# Altium PCB 7797-20-0224.PcbDoc (part 1 of 2)
Units mil, origin at the board's own origin, x right, y up, seen from the top; angles counter-clockwise.
Board outline 1500 x 3000 mil, 6 copper layers (Top Layer, GND, NS, EW, PWR, Bottom Layer), stack 48.468 mil thick; 119 components, 95 nets, 430 pads, 191 vias.
Unrouted connection lines stored in the file: 5.
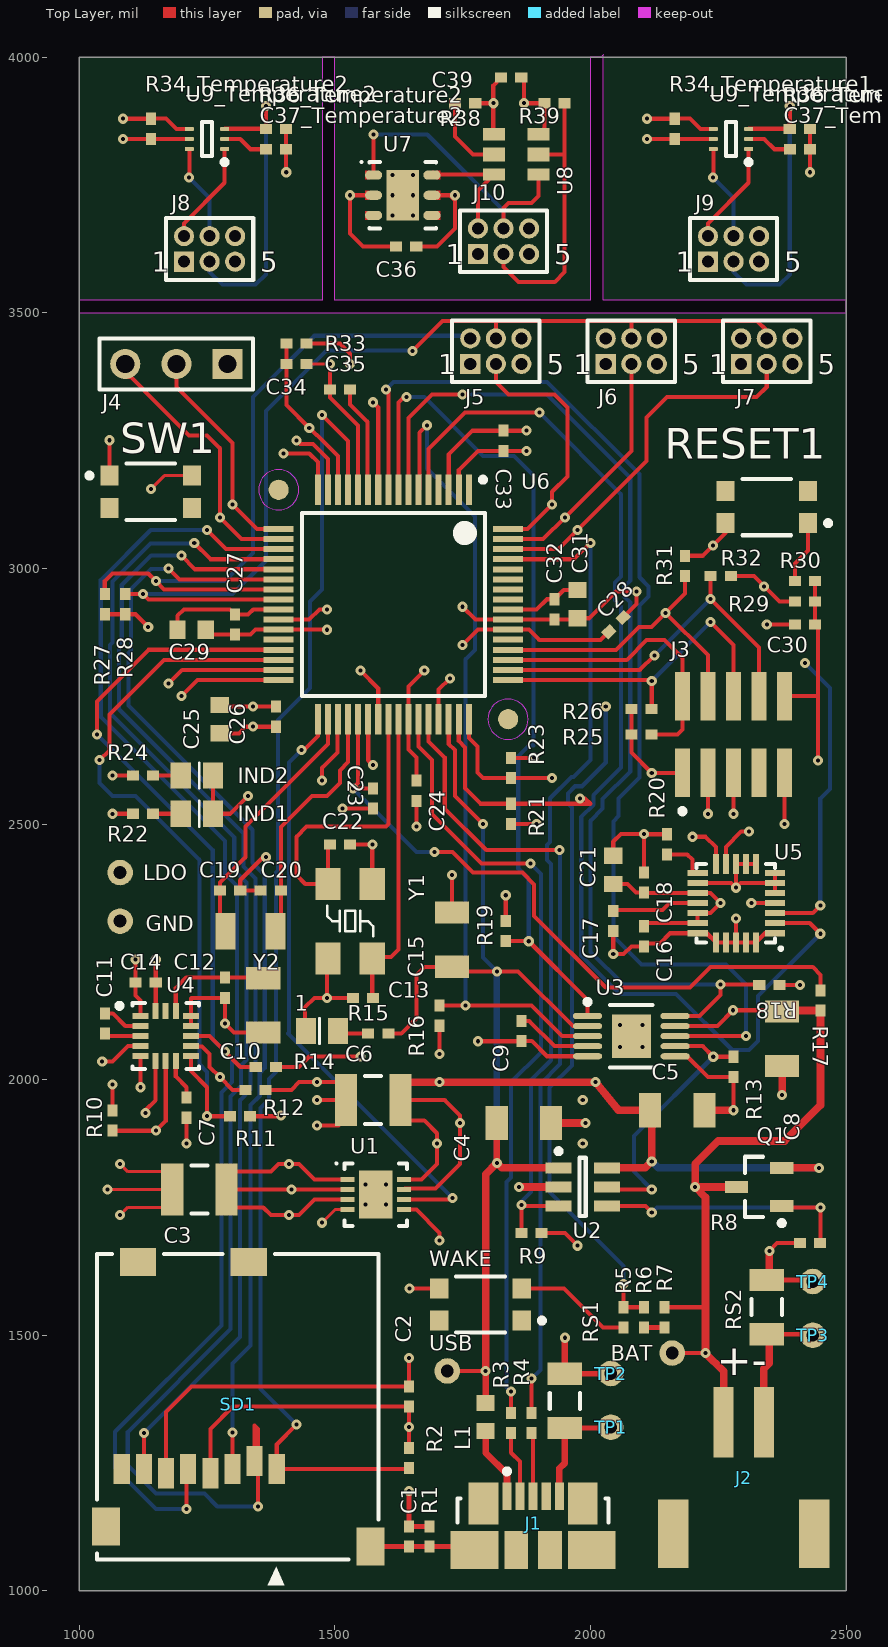
[diagram p0: Top Layer view]
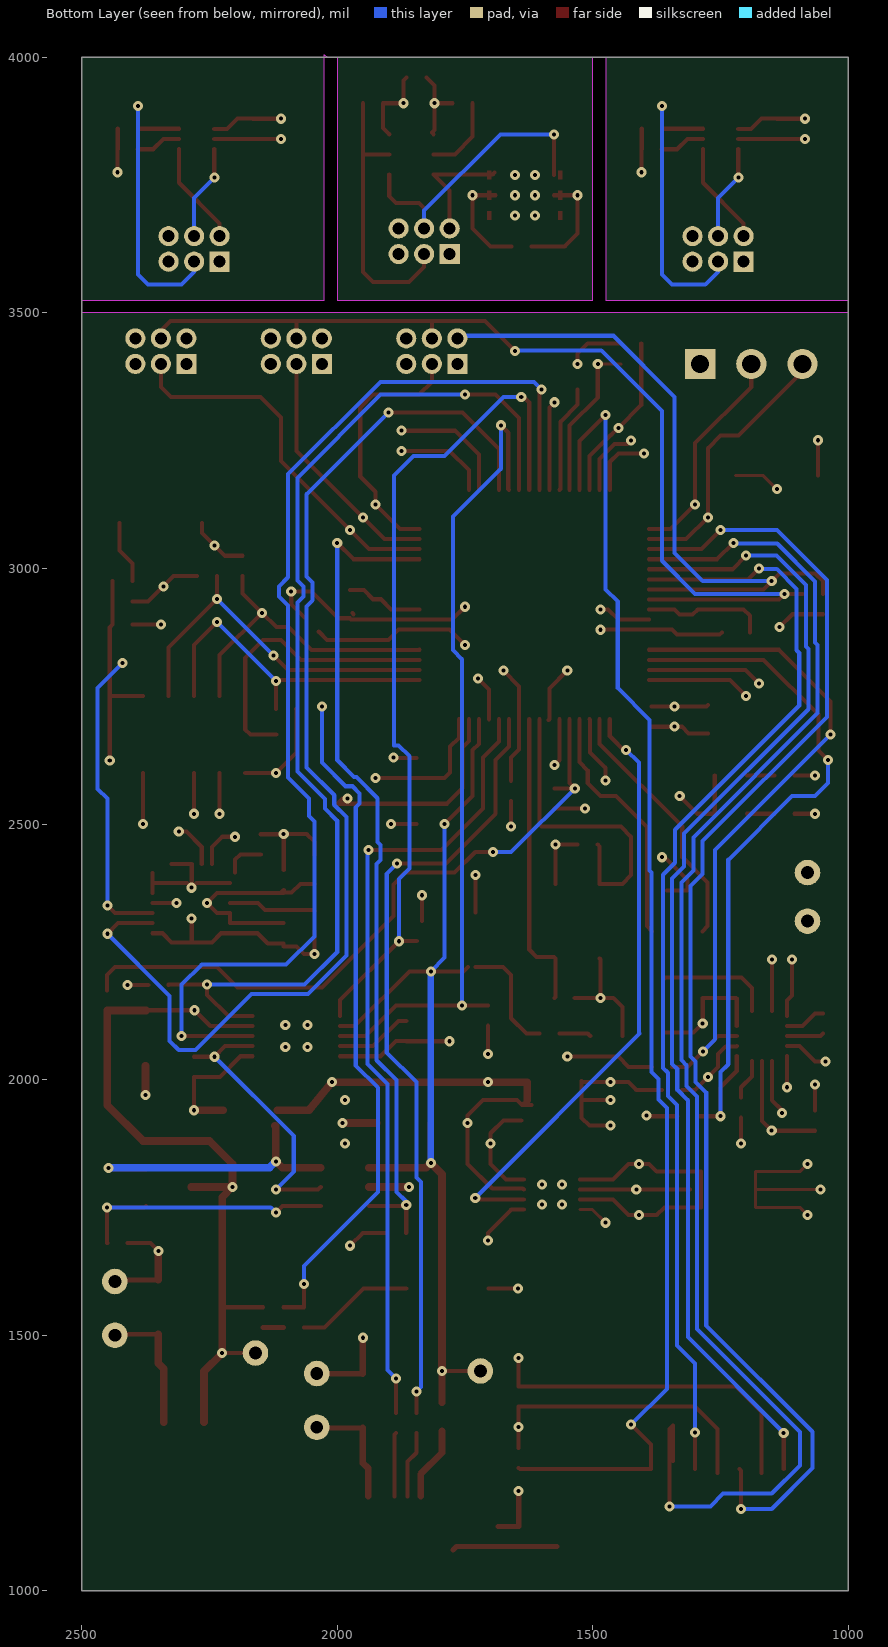
[diagram p1: Bottom Layer view, seen from below]
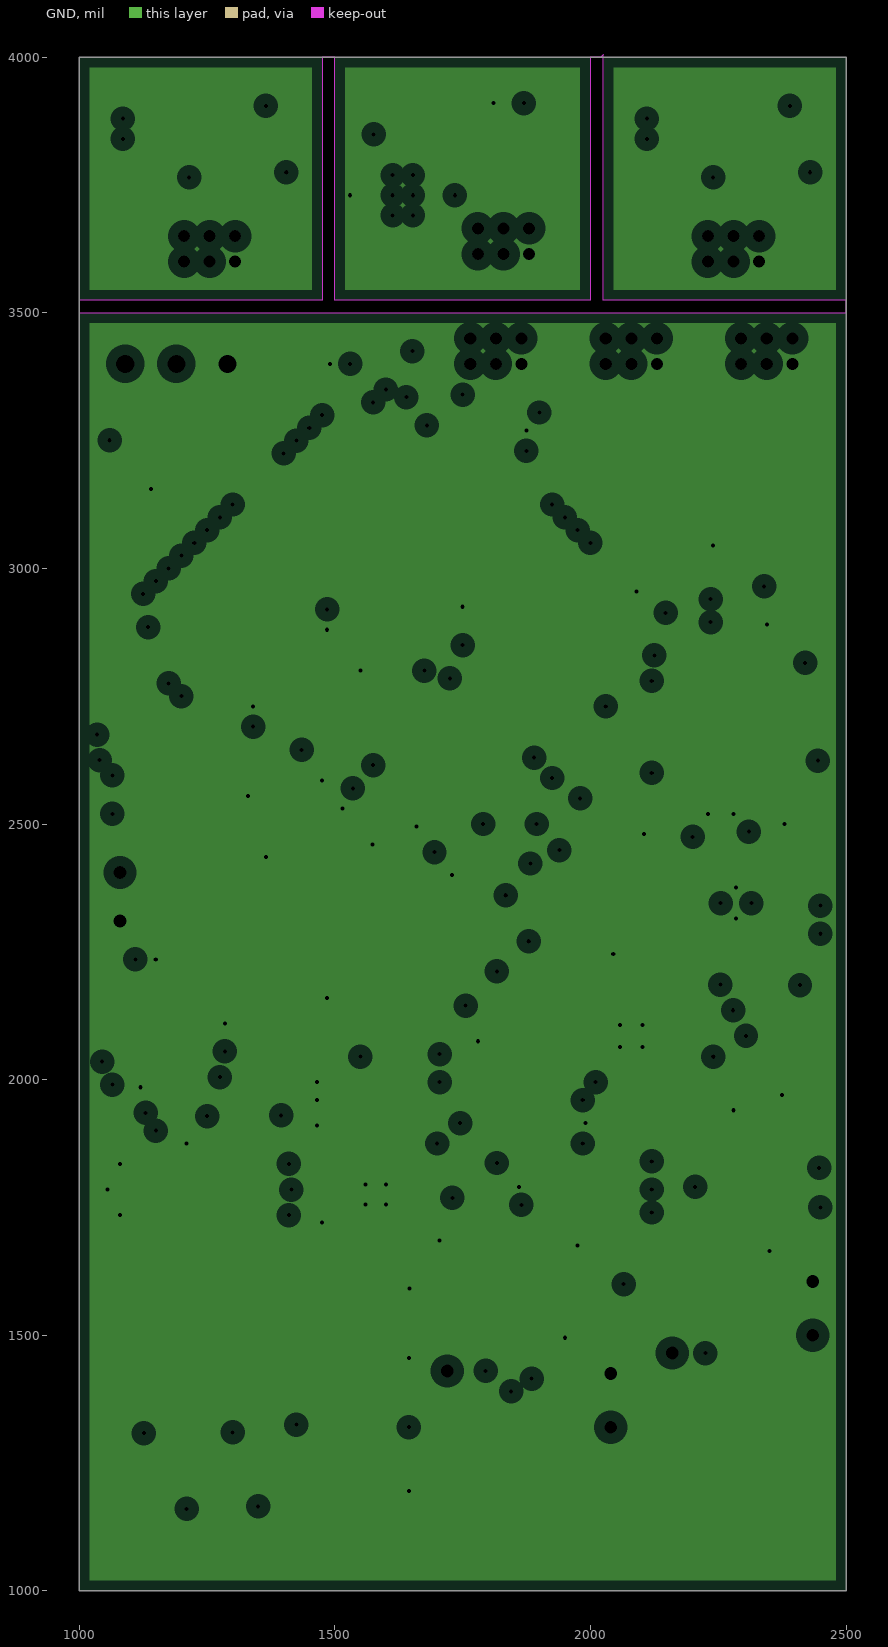
[diagram p2: GND, clearances drawn from the general rule]
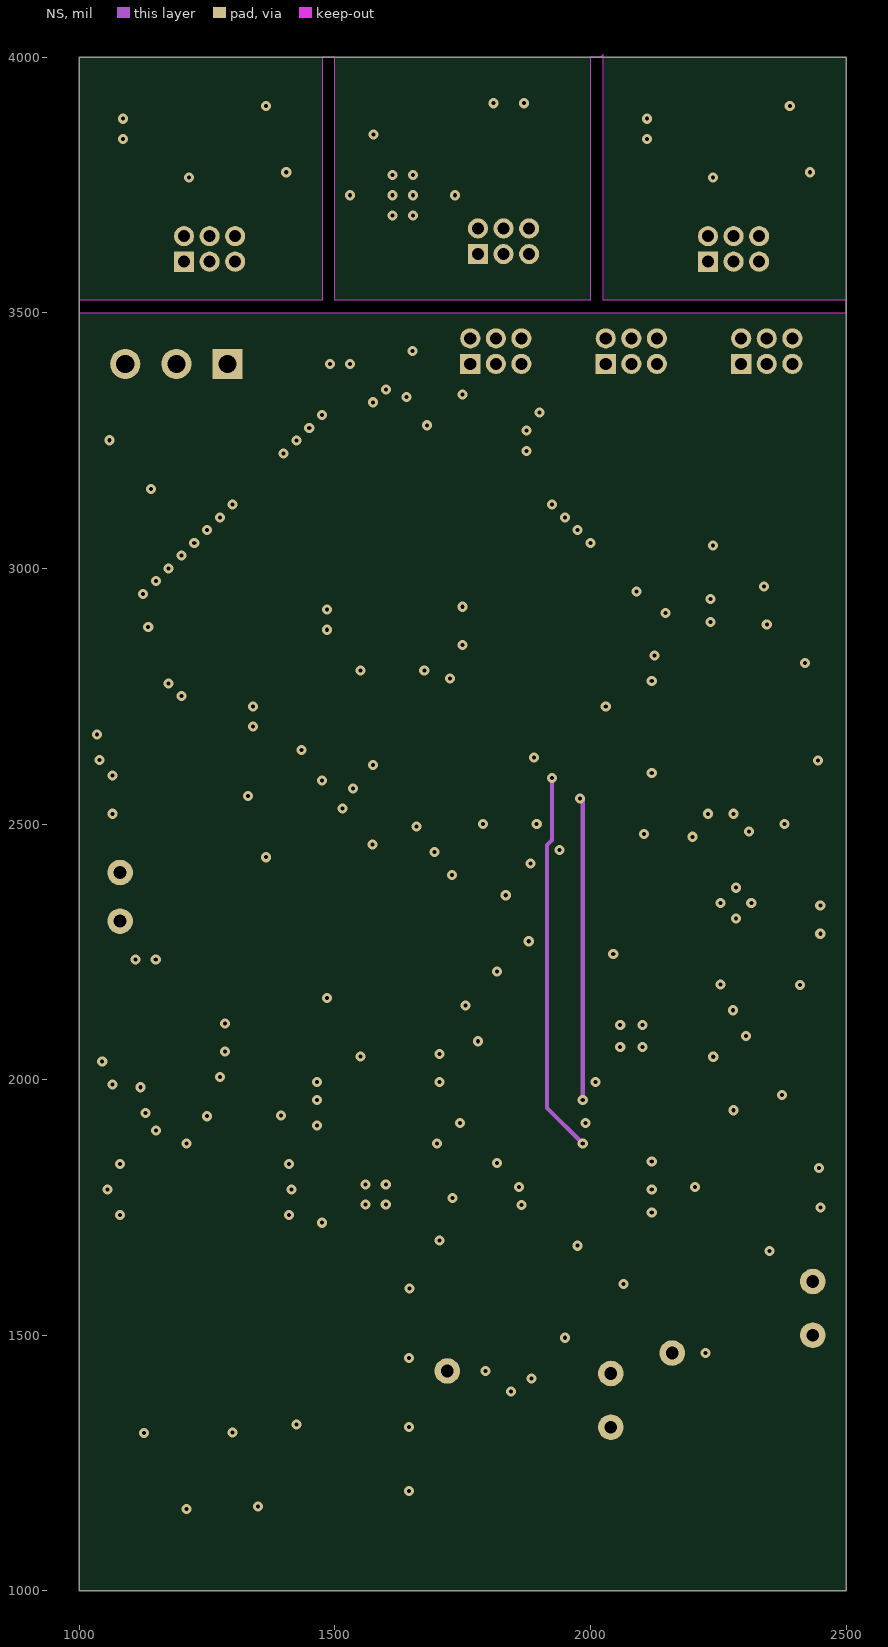
[diagram p3: NS]
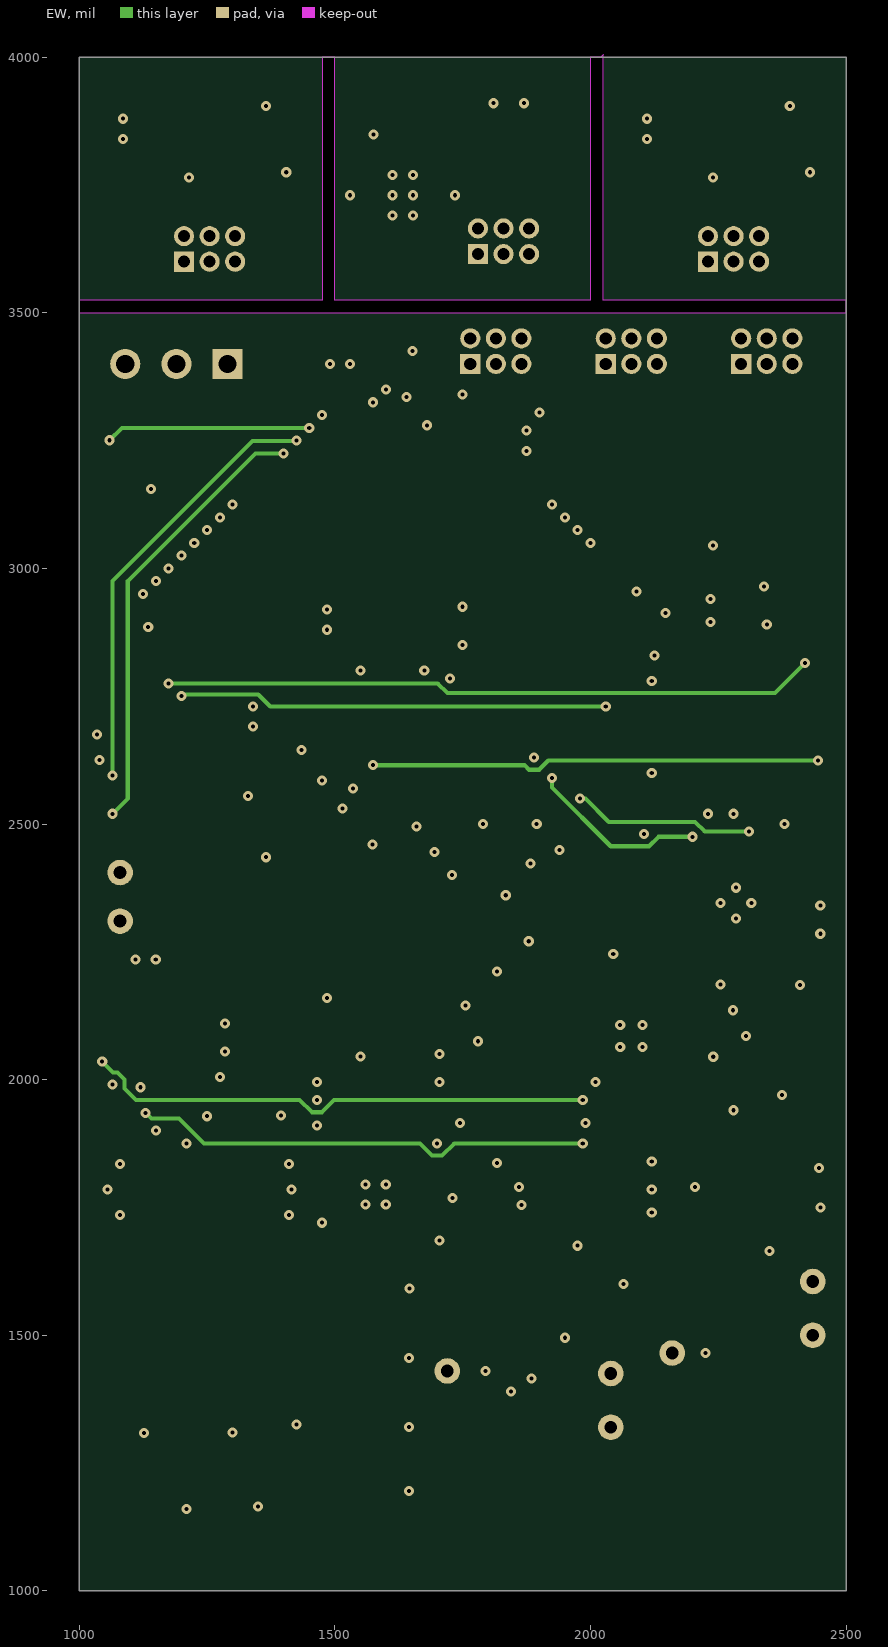
[diagram p4: EW]
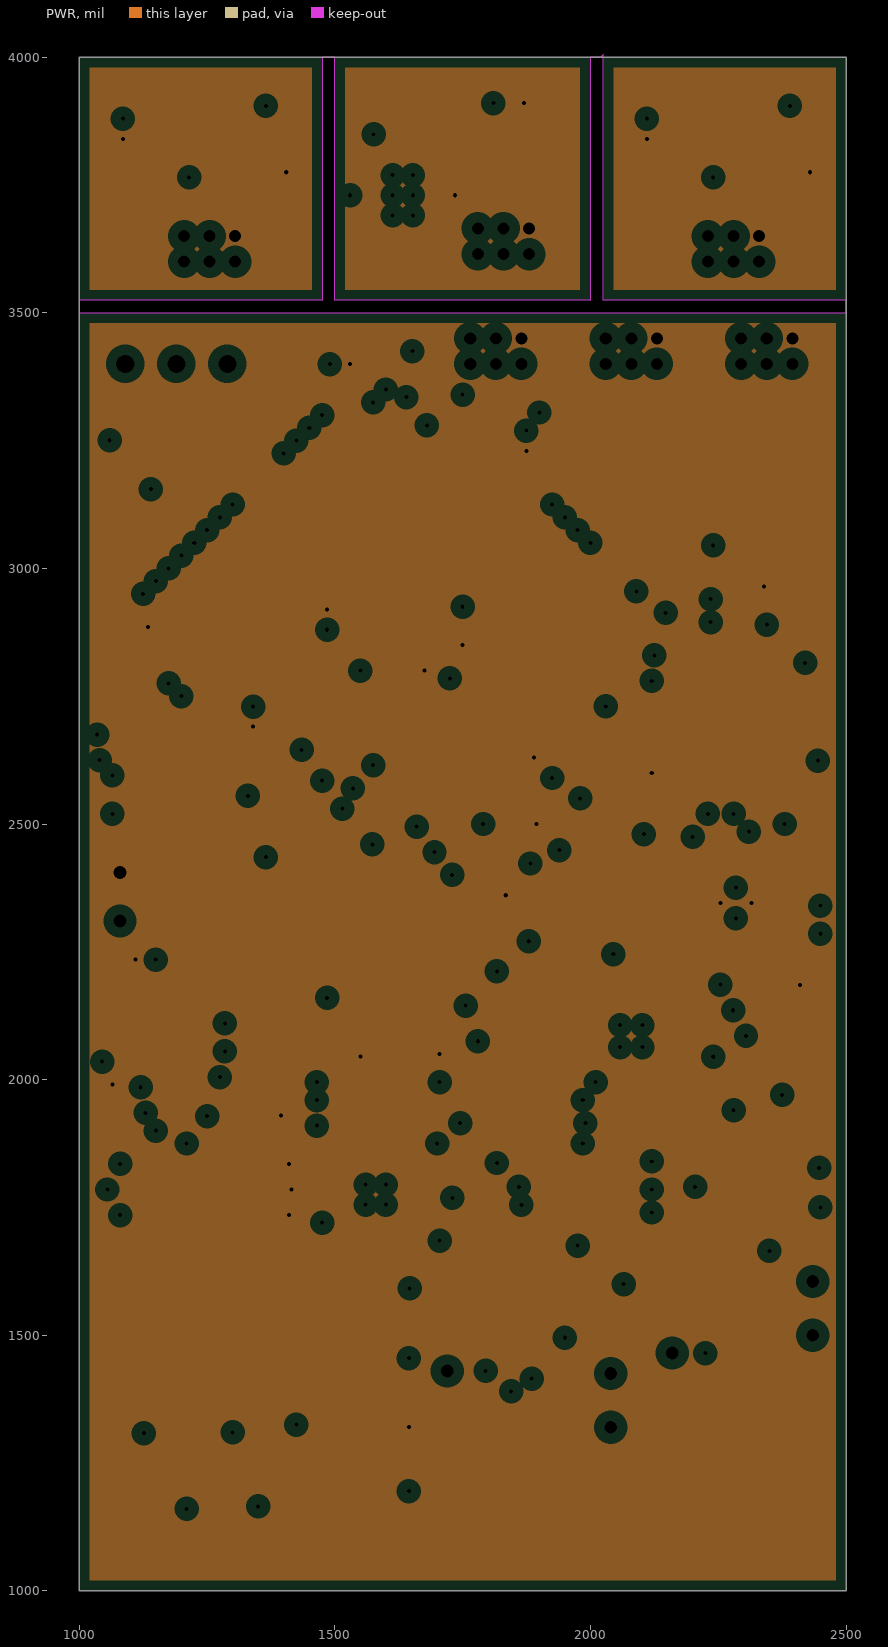
[diagram p5: PWR, clearances drawn from the general rule]

## Layer stack, top to bottom
Top Solder: solder mask 0.4, Solder Resist, Dk 3.5
Top Layer: signal copper 1.4
Dielectric 2: core 10, Dk 4.2
GND: plane copper 1.417, net (Multiple Nets)
Dielectric 1: prepreg 5, FR-4, Dk 4.2
NS: signal copper 1.417
Dielectric 4: core 10, Dk 4.2
EW: signal copper 1.417
Dielectric 5: prepreg 5, Dk 4.2
PWR: plane copper 1.417, net (Multiple Nets)
Dielectric 3: core 10, Dk 4.2
Bottom Layer: signal copper 1.4
Bottom Solder: solder mask 0.4, Solder Resist, Dk 3.5

## Board outline
1000,1000 1000,4000 2500,4000 2500,1000
cut-out: 1000,3500 2500,3500 2500,3525 2025,3525 2025,4005 2020,4000 2000,4000 2000,3525 1500,3525 1500,4000 1475,4000 1475,3525 1000,3525

## Design rules (kind name [scope] priority, off if disabled: settings)
Clearance Clearance-uC [HasFootprint('QFP50P1200X1200X160-64N') OR HasFootprint('LT-MSE-10-EDP-2060x1830TP_N') OR HasFootprint('SMD QFN 24_4X4MM 7/5') OR HasFootprint('FREE-QFN-16-3000X3000DE_V')] p1: gap=0 ignorepadtopadclearanceinfootprint=TRUE
Clearance [All] p2: gap=10 ignorepadtopadclearanceinfootprint=TRUE
PlaneClearance [All] p1: clearance=20
PlaneConnect [All] p1: planeconnectstyle=Relief reliefexpansion=20 reliefentries=4 reliefconductorwidth=10 reliefairgap=10
PolygonConnect [All] p1: connectstyle=Relief reliefconductorwidth=10 reliefentries=4 polygonreliefangle="90 Angle" airgapwidth=10
RoutingVias [All] p1: holewidth=28 width=50 viastyle="Through Hole" minholewidth=28 minwidth=50 maxholewidth=28 maxwidth=50 useviatemplates=TRUE viatemplateguid#1={3E3A0D4B-A0A5-4DA1-8870-E81B4EFEB651} viatemplatename#1=v50h20
SolderMaskExpansion [All] p1: expansion=4
Width "Width Power" [(InNet('sGND') OR InNet('sPWR_3V7') OR InNet('sPWR_5V0') OR InNet('sUNREG') OR InNet('NetJ203_1') OR InNet('NetJ200_1') OR InNet('NetJ200_5'))] p1: maxlimit=15 minlimit=6 preferedwidth=15
Width [All] p2: maxlimit=10 minlimit=8 preferedwidth=8
28 further rules are at their usual default settings.

## Classes and differential pairs
component class "Micro SD": C2 R2 SD1
component class "I2C 1": J5 J6 J7 J8 J9 J10 R27 R28
component class Gyroscope: C16 C17 C18 C21 R20 U5
component class Power: BAT C1 C3 C4 C5 C6 C8 C9 C15 GND J1 J2 L1 LDO Q1 R1 R3 R4 R8 R9 R13 R16 R18 R19 RS1 RS2 TP1 TP2 TP3 TP4 U1 U2 U3 USB
component class Microcontroller: 90 C13 C19 C20 C22 C23 C24 C25 C26 C27 C28 C29 C30 C31 C32 C33 C34 J3 R5 R6 R7 R17 R25 R26 R29 R30 R31 R32 RESET1 U6 WAKE Y1 Y2
component class "Accelerometer and Mangnetometer": C7 C10 C11 C12 C14 R10 R11 R12 R14 U4
component class "I2C 0": R21 R23
component class Light: C39 R38 R39 U8
component class Temperature2: C37_Temperature2 R34_Temperature2 R36_Temperature2 U9_Temperature2
component class Humidity: C36 U7
component class Temperature1: C37_Temperature1 R34_Temperature1 R36_Temperature1 U9_Temperature1
channel class _temperature: Temperature1 Temperature2
component class I/O: 1 C35 IND1 IND2 J4 R15 R22 R24 R33 SW1

## Components (designator, comment, footprint, x,y, rotation, side; value= is the part's Value field where it differs from the comment)
1 "LTST-C171TBKT" 0805 1475,2095 r180 top (schematic designator 5V0)
BAT "TP" TP_TH 2160,1465 r90 top
C1 "GRM155R71A104KA01D" 0402 1645,1106.38 r270 top value=0.1u (schematic designator C207)
C2 "GRM155R71C103KA01D" 0402 1645,1380 r270 top value="0.01 µF" (schematic designator C600)
C3 "GRM32ER71H106KA12L" 1210 1235,1785 r0 top value=10u (schematic designator C201)
C4 "GRM31CR71H475KA12L" 1206 1870,1915 r180 top value=4.7u (schematic designator C205)
C5 "GRM31CR71H475KA12L" 1206 2170,1940 r180 top value=4.7u (schematic designator C203)
C6 "GRM32ER71H106KA12L" 1210 1575,1960 r0 top value=10u (schematic designator C200)
C7 "GRM155R71A104KA01D" 0402 1210,1945 r270 top value=0.1u (schematic designator C310)
C8 "GRM31CR71H475KA12L" 1206 2375,2080 r90 top value=4.7u (schematic designator C204)
C9 "GRM155R71A104KA01D" 0402 1865,2095 r90 top value=0.1u (schematic designator C206)
C10 "GRM31CR71H475KA12L" 1206 1360,2145 r90 top value=4.7u (schematic designator C314)
C11 "GRM155R71A104KA01D" 0402 1050,2109.69 r270 top value=0.1u (schematic designator C311)
C12 "GRM155R71A104KA01D" 0402 1285,2179.68 r90 top value=0.1u (schematic designator C313)
C13 "GRM1555C1H330FA01D" 0402 1555,2160 r0 top value=33p (schematic designator C101)
C14 "GRM155R71A104KA01D" 0402 1130,2190 r180 top value=0.1u (schematic designator C312)
C15 "GRM31CR71H475KA12L" 1206 1729.37,2273.78 r270 top value=4.7u (schematic designator C202)
C16 "GRM155R71A104KA01D" 0402 2104.68,2280.32 r90 top value=0.1u (schematic designator C321)
C17 "GRM155R71A104KA01D" 0402 2044.68,2310.32 r270 top value=0.1u (schematic designator C320)
C18 "GRM155R71A104KA01D" 0402 2104.68,2385.32 r270 top value=0.1u (schematic designator C322)
C19 "GRM1555C1H240GA01D" 0402 1295.32,2370 r180 top value=24p (schematic designator C103)
C20 "GRM1555C1H240GA01D" 0402 1374.68,2370 r0 top value=24p (schematic designator C104)
C21 "GRM188R71A105KA61J" 0603 2044.68,2410.32 r90 top value=1u (schematic designator C323)
C22 "GRM1555C1H330FA01D" 0402 1510,2460 r180 top value=33p (schematic designator C102)
C23 "GRM155R71A104KA01D" 0402 1575,2550 r270 top value=0.1u (schematic designator C107)
C24 "GRM155R71A104KA01D" 0402 1660,2565 r270 top value=0.1u (schematic designator C114)
C25 "GRM188R71A105KA61J" 0603 1275,2705 r90 top value=1u (schematic designator C115)
C26 "GRM155R71C103KA01D" 0402 1385,2710 r90 top value="0.01 µF" (schematic designator C108)
C27 "GRM155R71A104KA01D" 0402 1305,2890 r270 top value=0.1u (schematic designator C106)
C28 "GRM155R71C103KA01D" 0402 2050,2890 r45 top value="0.01 µF" (schematic designator C105)
C29 "GRM188R71A225KE15D" 0603 1220,2880 r0 top value=2.2u (schematic designator C113)
C30 "GRM155R71A104KA01D" 0402 2420,2890 r180 top value=0.1u (schematic designator C100)
C31 "GRM188R71A105KA61J" 0603 1975,2930 r270 top value=1u (schematic designator C111)
C32 "GRM155R71A104KA01D" 0402 1930,2920 r270 top value=0.1u (schematic designator C109)
C33 "GRM155R71C103KA01D" 0402 1830,3249.69 r90 top value="0.01 µF" (schematic designator C110)
C34 "GRM155R71A104KA01D" 0402 1510,3350 r180 top value=0.1u (schematic designator C112)
C35 "GRM022R71A102KA12L" 0402 1425,3400 r180 top value=1000p (schematic designator C500)
C36 "GRM155R71A104KA01D" 0402 1639.69,3630 r0 top value=0.1u (schematic designator C430)
C37_Temperature1 "GRM155R71C103KA01D" 0402 2410,3820 r0 top value="0.01 µF" (schematic designator C37)
C37_Temperature2 "GRM155R71C103KA01D" 0402 1385,3820 r0 top value="0.01 µF" (schematic designator C37)
C39 "GRM155R71A104KA01D" 0402 1845,3960 r0 top value=0.1u (schematic designator C420)
GND "TP" TP_TH 1080,2310 r90 top
IND1 "LTST-C171GKT" 0805 1230,2520 r0 top
IND2 "LTST-C171KSKT" 0805 1230,2595 r0 top
J1 "47346-0001" MOLX-47346-0001-5_V 1887.97,1087.87 r0 top locked (schematic designator J200)
J2 "S2B-PH-SM4-TB" S2B-PH-SM4-TB 2300,1330 r0 top locked (schematic designator J203)
J3 "M50-3600542" M50-3600542 2280,2675 r0 top (schematic designator J100)
J4 "Header 3" HDR1X3 1290,3400 r180 top (schematic designator J500)
J5 "MHDR2X3" MHDR2X3 1765,3400 r0 top (schematic designator J400)
J6 "MHDR2X3" MHDR2X3 2030,3400 r0 top (schematic designator J402)
J7 "MHDR2X3" MHDR2X3 2295,3400 r0 top (schematic designator J404)
J8 "MHDR2X3" MHDR2X3 1205,3600 r0 top (schematic designator J401)
J9 "MHDR2X3" MHDR2X3 2230,3600 r0 top (schematic designator J405)
J10 "MHDR2X3" MHDR2X3 1780,3615 r0 top (schematic designator J403)
L1 "MPZ1608S331A" 1608[0603] 1795,1340 r90 top value="330 ohms" (schematic designator L200)
LDO "TP" TP_TH 1080,2405 r90 top
Q1 "IRLML6401" Micro3_N 2330,1790 r180 top (schematic designator Q200)
R1 "CRCW04021M00FKEDHP" 0402 1685,1106.38 r270 top value=1M (schematic designator R207)
R2 "CRCW040210K0FKEDHP" 0402 1645,1260 r90 top value=10k (schematic designator R600)
R3 "CRCW040233R0FKED" 0402 1845,1328.19 r90 top value=33 (schematic designator R200)
R4 "CRCW040233R0FKED" 0402 1885,1328.19 r90 top value=33 (schematic designator R201)
R5 "CRCW0402100KFKED" 0402 2065,1535 r90 top value=100k (schematic designator R104)
R6 "CRCW0402100KFKED" 0402 2105,1535 r90 top value=100k (schematic designator R103)
R7 "CRCW0402100KFKED" 0402 2145,1535 r270 top value=100k (schematic designator R102)
R8 "CRCW04021M00FKEDHP" 0402 2429.68,1680 r0 top value=1M (schematic designator R202)
R9 "CRCW040210K0FKED" 0402 1885,1700 r180 top value=10k (schematic designator R208)
R10 "CRCW040210K0FKED" 0402 1065,1919.68 r90 top value=10k (schematic designator R312)
R11 "CRCW040210K0FKED" 0402 1314.69,1928.33 r180 top value=10k (schematic designator R310)
R12 "CRCW040210K0FKED" 0402 1345,1980 r0 top value=10k (schematic designator R313)
R13 "CRCW04023K40FKED" 0402 2280,2025 r90 top value=3.4k (schematic designator R204)
R14 "CRCW040210K0FKED" 0402 1365,2025 r180 top value=10k (schematic designator R311)
R15 "CRCW0402560RFKEDHP" 0402 1585,2090 r0 top value=560 (schematic designator R503)
R16 "CRCW040210K0FKED" 0402 1705,2125 r90 top value=10k (schematic designator R206)
R17 "CRCW040256R0FKED" 0402 2450,2155 r270 top value=56 (schematic designator R106)
R18 "CRCW040210K0FKED" 0402 2350,2185 r180 top value=10k (schematic designator R205)
R19 "CRCW040210K0FKED" 0402 1834.37,2290.63 r270 top value=10k (schematic designator R203)
R20 "CRCW040210K0FKED" 0402 2149.68,2460.32 r90 top value=10k (schematic designator R320)
R21 "CRCW04025K60FKEDHP" 0402 1845,2520 r270 top value=5.6k (schematic designator R300)
R22 "CRCW0402560RFKEDHP" 0402 1125,2520 r180 top value=560 (schematic designator R500)
R23 "CRCW04025K60FKEDHP" 0402 1845,2609.68 r90 top value=5.6k (schematic designator R301)
R24 "CRCW0402560RFKEDHP" 0402 1125,2595 r180 top value=560 (schematic designator R501)
R25 "CRCW040210K0FKED" 0402 2099.68,2675 r0 top value=10k (schematic designator R108)
R26 "CRCW040210K0FKED" 0402 2100,2725 r0 top value=10k (schematic designator R107)
R27 "CRCW04025K60FKEDHP" 0402 1050,2930 r270 top value=5.6k (schematic designator R400)
R28 "CRCW04025K60FKEDHP" 0402 1090,2930 r270 top value=5.6k (schematic designator R401)
R29 "CRCW040210K0FKED" 0402 2420,2935 r180 top value=10k (schematic designator R100)
R30 "CRCW0402560RFKEDHP" 0402 2420,2975 r0 top value=560 (schematic designator R101)
R31 "CRCW040210K0FKED" 0402 2185,3005 r270 top value=10k (schematic designator R109)
R32 "CRCW040210K0FKED" 0402 2255,2985 r180 top value=10k (schematic designator R105)
R33 "CRCW040210K0FKEDHP" 0402 1425,3440 r0 top value=10k (schematic designator R502)
R34_Temperature1 "CRCW040210K0FKED" 0402 2165,3860 r270 top value=10k (schematic designator R34)
R34_Temperature2 "CRCW040210K0FKED" 0402 1140,3860 r270 top value=10k (schematic designator R34)
R36_Temperature1 "CRCW040210K0FKED" 0402 2409.68,3860 r180 top value=10k (schematic designator R36)
R36_Temperature2 "CRCW040210K0FKED" 0402 1384.68,3860 r180 top value=10k (schematic designator R36)
R38 "CRCW040210K0FKED" 0402 1755,3910 r0 top value=10k (schematic designator R421)
R39 "CRCW040210K0FKED" 0402 1930,3910 r0 top value=10k (schematic designator R420)
RESET1 "KMR231GLFS" CKCP-KMR231GLFS 2345,3120 r180 top (schematic designator RESET)
RS1 "WSL1206R1000FEA" C1206 1950,1371.5 r270 top value=0.1 (schematic designator RS200)
RS2 "WSL1206R1000FEA" C1206 2345,1555 r270 top value=0.1 (schematic designator RS201)
SD1 "2908-05WB-MG" 3M-2908-05WB-MG_V 1310,1360 r180 top locked (schematic designator SD600)
SW1 "KMR231GLFS" CKCP-KMR231GLFS 1140,3150 r0 top
TP1 "TP" TP_TH 2040,1320 r90 top (schematic designator TP200)
TP2 "TP" TP_TH 2040,1425 r90 top (schematic designator TP201)
TP3 "TP" TP_TH 2435,1500 r90 top (schematic designator TP202)
TP4 "TP" TP_TH 2435,1605 r90 top (schematic designator TP203)
U1 "LT1965EDD-3.3#TRPBF" LT-DD-8_V 1580,1775 r0 top (schematic designator U200)
U2 "LTC4410ES6#PBF" LT-S6-6-TSOT-23_N 1985,1790 r0 top (schematic designator U202)
U3 "LTC4053EMSE-4.2#PBF" LT-MSE-10-EDP-2060x1830TP_N 2080,2085 r0 top (schematic designator U201)
U4 "FXOS8700CQR1" FREE-QFN-16-3000X3000DE_V 1169.21,2085.32 r0 top (schematic designator U310)
U5 "FXAS21002C" "SMD QFN 24_4X4MM 7/5" 2284.68,2345.32 r180 top (schematic designator U320)
U6 "TM4C123GH6PM" QFP50P1200X1200X160-64N 1614.53,2929.41 r270 top (schematic designator U100)
U7 "SI7006-A20-IM1" SLAB-DFN-6-1500X2400TP_V 1632.91,3730 r0 top (schematic designator U430)
U8 "APDS-9303" APDS-9303 1855,3810 r180 top (schematic designator U420)
U9_Temperature1 "TMP102AIDRLT" DRL0006A_L 2275,3840 r180 top (schematic designator U9)
U9_Temperature2 "TMP102AIDRLT" DRL0006A_L 1250,3840 r180 top (schematic designator U9)
USB "TP" TP_TH 1720,1430 r90 top
WAKE "KMR231GLFS" CKCP-KMR231GLFS 1785,1560 r180 top
Y1 "ECS-160-20-30B-DU" ECX-53B 1530,2310 r90 top (schematic designator Y100)
Y2 "CC7V-T1A-32.768kHz-12.5pF-20PPM-TC-QC" CC7V-T1A 1335,2290 r0 top (schematic designator Y101)

## Footprints (in the part's own frame and the unit in brackets; to place one, negate y for a bottom-side part, rotate by r counter-clockwise, add the part's x,y. Pads: shape width x height; smd on the part's side, far side on the other; paste and mask are expansions set on the pad)
3M-2908-05WB-MG_V [mm] "Connector, MicroSD, 8 Position, Body 15.2x14mm, Pitch 1.1mm"
  rect 0.8x1.5 smd: 1(-1.94,3.1) 2(-0.84,2.7) 3(0.26,3.1) 4(1.36,3.3) 5(2.46,3.1) 6(3.56,3.3) 7(4.66,3.1) 8(5.76,3.1)
  rect 1.4x1.9 smd: 9(6.55,5.95) 12(-6.6,6.95)
  rect 1.8x1.4 smd: 10(4.95,-7.2) 11(-0.55,-7.2)
  silkscreen extent -7,-7.6 7,8.87, body extent -7,-7.6 7,7.6, height 1.85
0402 [mm] "Chip Capacitor, Body 1.0x0.5mm, IPC High Density"
  rect 0.6x0.5 smd: 1(-0.5,0) 2(0.5,0)
  body extent -0.55,-0.3 0.55,0.3, height 1.3
0603 [mm] "Chip Capacitor, Body 1.6x0.8mm, IPC High Density"
  rect 0.8x0.9 smd: 1(-0.7,0) 2(0.7,0)
  body extent -0.87,-0.48 0.87,0.48, height 1.3
0805 [mm]
  rect 1x1.3 smd: 1(-0.8,0) 2(0.8,0)
  silkscreen extent 0.13,-0.64 0.13,0.63, body extent -1.07,-0.64 1.07,0.76, height 0.7
1206 [mm] "Chip Capacitor, Body 3.2x1.6mm, IPC High Density"
  rect 1.1x1.7 smd: 1(-1.35,0) 2(1.35,0)
  body extent -1.7,-0.9 1.7,0.9, height 1.3
1210 [mm] "Chip Capacitor, Body 3.2x2.5mm, IPC High Density"
  rect 1.1x2.6 smd: 1(-1.35,0) 2(1.35,0)
  silkscreen extent -0.4,-1.2 0.4,1.2, body extent -1.7,-1.35 1.7,1.35, height 1.3
1608[0603] [mm] "Chip Capacitor, Body 1.6x0.8mm, IPC High Density"
  rect 0.8x0.9 smd: 1(-0.7,0) 2(0.7,0)
  body extent -0.87,-0.48 0.87,0.48, height 1.3
APDS-9303 [mm]
  rect 1.1x0.6 smd: 1(-1.1,-1) 2(1.1,-1) 4(1.1,1) 5(-1.1,1)
  rect 1.1x0.7 smd: 3(1.1,0) 6(-1.1,0)
  body extent -1.3,-1.1 1.3,1.1, height 0.55
C1206 [mm] "Chip Capacitor, Body 3.2x1.6mm, IPC High Density"
  rect 1.1x1.7 smd: 1(-1.35,0) 2(1.35,0)
  silkscreen extent -0.4,-0.75 0.4,0.75, body extent -1.7,-0.9 1.7,0.9, height 1.3
CC7V-T1A [mm]
  rect 1x1.8 smd: 1(-1.25,0) 2(1.25,0)
  body extent -1.65,-0.76 1.65,0.76, height 0.9
CKCP-KMR231GLFS [mm] "SMD, 4-Leads, Body 4.6x2.8mm"
  rect 0.9x1 smd: 1(-2.05,0.8) 2(-2.05,-0.8) 3(2.05,0.8) 4(2.05,-0.8)
  silkscreen extent -3.17,-1.4 1.21,1.4, body extent -2.3,-1.4 2.3,1.4, height 1.92
DRL0006A_L [mm] "SOT23, 6-Leads, Body 1.7x1.3mm, Pitch 0.5mm, IPC High Density"
  rrect50% 0.45x0.2 smd: 1(-0.875,0.5) 2(-0.875,0) 3(-0.875,-0.5) 4(0.875,-0.5) 5(0.875,0) 6(0.875,0.5)
  silkscreen extent -1,-0.85 0.25,1.27, body extent -0.65,-0.85 0.65,0.85, height 0.6
ECX-53B [mm]
  rect 1.6x1.25 smd: 1(-1.85,-1.1) 2(1.85,-1.1) 3(1.85,1.1) 4(-1.85,1.1)
  silkscreen extent -0.76,-1.14 0.76,1.14, body extent -2.54,-1.65 2.54,1.65, height 0.85
FREE-QFN-16-3000X3000DE_V [mm] "QFN, 16-Leads, Body 3.00x3.00mm, Pitch 0.50mm"
  rect 0.8x0.3 smd: 1(-1.25,1) 2(-1.25,0.5) 3(-1.25,0) 4(-1.25,-0.5) 5(-1.25,-1) 9(1.25,-1) 10(1.25,-0.5) 11(1.25,0) 12(1.25,0.5) 13(1.25,1)
  rect 0.3x0.8 smd: 6(-0.5,-1.25) 7(0,-1.25) 8(0.5,-1.25) 14(0.5,1.25) 15(0,1.25) 16(-0.5,1.25)
  silkscreen extent -2.42,-1.65 1.65,1.65, body extent -1.5,-1.5 1.5,1.5, height 1.25
HDR1X3 [mm] "Connector; Header; 3 Position"
  rect 1.5x1.5 hole 0.9: 1(0,0)
  round 1.5 hole 0.9: 2(2.54,0) 3(5.08,0)
  silkscreen extent -1.27,-1.27 6.35,1.27
LT-DD-8_V [mm] "SON, 8-Leads, Body 3x3mm, Pitch 0.5mm, Thermal Pad 1.65x2.38 mm, IPC Low Density"
  rect 0.7x0.25 smd mask+0.102: 1(-1.4,0.75) 2(-1.4,0.25) 3(-1.4,-0.25) 4(-1.4,-0.75) 5(1.4,-0.75) 6(1.4,-0.25) 7(1.4,0.25) 8(1.4,0.75)
  rect 1.65x2.38 smd mask+0.102: 9(0,0)
  silkscreen extent -2,-1.55 1.55,1.6, body extent -1.5,-1.5 1.5,1.5, height 0.8
LT-MSE-10-EDP-2060x1830TP_N [mm] "SOP, 10-Leads, Body 3.1x3.1mm, Pitch 0.5mm, Thermal Pad 2.17x1.94mm, IPC Medium Density"
  oval 1.45x0.3 smd: 1(-2.175,1) 2(-2.175,0.5) 3(-2.175,0) 4(-2.175,-0.5) 5(-2.175,-1) 6(2.175,-1) 7(2.175,-0.5) 8(2.175,0) 9(2.175,0.5) 10(2.175,1)
  rect 1.94x2.17 smd: 11(0,0)
  silkscreen extent -2.3,-1.55 1.05,1.82, body extent -1.55,-1.55 1.55,1.55, height 1.1
LT-S6-6-TSOT-23_N [mm] "SOT23, 6-Leads, Body 2.9x1.75mm, Pitch 0.95mm, IPC Medium Density"
  rect 1.3x0.55 smd: 1(-1.2,0.95) 2(-1.2,0) 3(-1.2,-0.95) 4(1.2,-0.95) 5(1.2,0) 6(1.2,0.95)
  silkscreen extent -1.32,-1.45 0.15,1.9, body extent -0.87,-1.45 0.87,1.45, height 1
M50-3600542 [mm] "Header, 0.05\", 2x10, SMT"
  rect 0.74x2.4 smd: 1(-2.54,-1.905) 2(-2.54,1.905) 3(-1.27,-1.905) 4(-1.27,1.905) 5(0,-1.905) 6(0,1.905) 7(1.27,-1.905) 8(1.27,1.905) 9(2.54,-1.905) 10(2.54,1.905)
  silkscreen extent -2.67,-3.94 -2.41,-3.68, body extent -3.18,-2.62 3.17,2.88, height 4.7
MHDR2X3 [mm] "Connector; Header; 3x2 Position"
  rect 1x1 hole 0.6: 1(0,0)
  round 1 hole 0.6: 2(0,1.27) 3(1.27,0) 4(1.27,1.27) 5(2.54,0) 6(2.54,1.27)
  silkscreen extent -0.9,-0.9 3.44,2.17
Micro3_N [mm] "SOT23, 3-Leads, Body 2.9x1.3mm, Pitch 0.95mm, Lead Span 2.3mm, IPC Medium Density"
  rect 1.15x0.6 smd: 1(-1.125,0.95) 2(-1.125,-0.95) 3(1.125,0)
  silkscreen extent -1.25,-1.5 0.7,1.92, body extent -0.7,-1.5 0.7,1.5, height 1.12
MOLX-47346-0001-5_V [mm] "SMD, 5-Leads, Body 7.5x5mm, Pitch 0.65mm"
  rect 0.45x1.38 smd: 1(-1.3,2.46) 2(-0.65,2.46) 3(0,2.46) 4(0.65,2.46) 5(1.3,2.46)
  rect 1.475x2.1 smd: 6(-2.462,2.1) 7(2.462,2.1)
  rect 2.375x1.9 smd: 8(-2.913,-0.2) 11(2.913,-0.2)
  rect 1.175x1.9 smd: 9(-0.837,-0.2) 10(0.837,-0.2)
  silkscreen extent -3.75,1.17 3.75,3.82, body extent -3.99,-2.78 3.99,2.65, height 2.69
QFP50P1200X1200X160-64N [mm]
  rect 1.5x0.3 smd: 1(-5.7,3.75) 2(-5.7,3.25) 3(-5.7,2.75) 4(-5.7,2.25) 5(-5.7,1.75) 6(-5.7,1.25) 7(-5.7,0.75) 8(-5.7,0.25) 9(-5.7,-0.25) 10(-5.7,-0.75) 11(-5.7,-1.25) 12(-5.7,-1.75) 13(-5.7,-2.25) 14(-5.7,-2.75) 15(-5.7,-3.25) 16(-5.7,-3.75) 33(5.7,-3.75) 34(5.7,-3.25) 35(5.7,-2.75) 36(5.7,-2.25) 37(5.7,-1.75) 38(5.7,-1.25) 39(5.7,-0.75) 40(5.7,-0.25) 41(5.7,0.25) 42(5.7,0.75) 43(5.7,1.25) 44(5.7,1.75) 45(5.7,2.25) 46(5.7,2.75) 47(5.7,3.25) 48(5.7,3.75)
  rect 0.3x1.5 smd: 17(-3.75,-5.7) 18(-3.25,-5.7) 19(-2.75,-5.7) 20(-2.25,-5.7) 21(-1.75,-5.7) 22(-1.25,-5.7) 23(-0.75,-5.7) 24(-0.25,-5.7) 25(0.25,-5.7) 26(0.75,-5.7) 27(1.25,-5.7) 28(1.75,-5.7) 29(2.25,-5.7) 30(2.75,-5.7) 31(3.25,-5.7) 32(3.75,-5.7) 49(3.75,5.7) 50(3.25,5.7) 51(2.75,5.7) 52(2.25,5.7) 53(1.75,5.7) 54(1.25,5.7) 55(0.75,5.7) 56(0.25,5.7) 57(-0.25,5.7) 58(-0.75,5.7) 59(-1.25,5.7) 60(-1.75,5.7) 61(-2.25,5.7) 62(-2.75,5.7) 63(-3.25,5.7) 64(-3.75,5.7)
  round 1 smd mask+0.5: 65(-5.7,-5.7) 66(5.7,5.7)
  Top Layer keep-out region: 6.7,5.7 6.624,6.083 6.407,6.407 6.083,6.624 5.7,6.7 5.7,6.7 5.317,6.624 4.993,6.407 4.776,6.083 4.7,5.7 4.7,5.7 4.776,5.317 4.993,4.993 5.317,4.776 5.7,4.7 5.7,4.7 6.083,4.776 6.407,4.993 6.624,5.317 6.7,5.7
  Top Layer keep-out region: -4.7,-5.7 -4.776,-5.317 -4.993,-4.993 -5.317,-4.776 -5.7,-4.7 -5.7,-4.7 -6.083,-4.776 -6.407,-4.993 -6.624,-5.317 -6.7,-5.7 -6.7,-5.7 -6.624,-6.083 -6.407,-6.407 -6.083,-6.624 -5.7,-6.7 -5.7,-6.7 -5.317,-6.624 -4.993,-6.407 -4.776,-6.083 -4.7,-5.7
  silkscreen extent -6.32,-4.55 4.55,4.58, body extent -6.07,-6.07 6.07,6.07, height 1.62
S2B-PH-SM4-TB [mm] "2 pin JST connector"
  rect 1.5x3.4 smd: 0(-3.5,-5.55) 0(3.5,-5.55)
  rect 1x3.5 smd: 1(1,0) 2(-1,0)
  body extent -3.96,-7.22 3.94,1.38, height 5.6
SLAB-DFN-6-1500X2400TP_V [mm] "SON, 6-Leads, Body 3x3mm, Pitch 1mm, Thermal Pad 1.6x2.5mm"
  oval 0.85x0.45 smd mask-1: 1(-1.45,1) 2(-1.45,0) 3(-1.45,-1) 4(1.45,-1) 5(1.45,0) 6(1.45,1)
  rect 1.6x2.5 smd mask-1: 7(0,0)
  Top Layer region: 1.65,-1.225 1.875,-1.225 1.875,-0.775 1.65,-0.775
  Top Layer region: 1.65,-0.225 1.875,-0.225 1.875,0.225 1.65,0.225
  Top Layer region: -1.875,0.775 -1.65,0.775 -1.65,1.225 -1.875,1.225
  Top Layer region: -1.875,-0.225 -1.65,-0.225 -1.65,0.225 -1.875,0.225
  Top Layer region: -1.875,-1.225 -1.65,-1.225 -1.65,-0.775 -1.875,-0.775
  Top Layer region: 1.65,0.775 1.875,0.775 1.875,1.225 1.65,1.225
  silkscreen extent -2.1,-1.65 1.65,1.7, body extent -1.5,-1.5 1.5,1.5, height 0.8
"SMD QFN 24_4X4MM 7/5" [mm]
  rect 1x0.3 smd: 1(-1.95,1.5) 2(-1.95,1) 3(-1.95,0.5) 4(-1.95,0) 5(-1.95,-0.5) 6(-1.95,-1) 7(-1.95,-1.5) 13(1.9,-1.5) 14(1.9,-1) 15(1.9,-0.5) 16(1.9,0) 17(1.9,0.5) 18(1.9,1) 19(1.9,1.5)
  rect 0.3x1 smd: 8(-1,-1.95) 9(-0.5,-1.95) 10(0,-1.95) 11(0.5,-1.95) 12(1,-1.95) 20(1,1.95) 21(0.5,1.95) 22(0,1.95) 23(-0.5,1.95) 24(-1,1.95)
  silkscreen extent -2.27,-1.95 1.95,2.3, body extent -2,-2.01 2.01,2, height 0.9
TP_TH [mil]
  round 50 hole 25: 1(0,0)

## Part data
1: library part LTST-C171GKT, "LED", Color=Blue
C1 C7 C9 C11 C12 C14 C16 C17 C18 C23 C24 C27 C30 C32 C34 C36 C39: library part GRM155R71AxxxKdddd, "-55-125C, 1005, 10V, X7R, ±10%", =DNP
C2 C26 C28 C33 C37_Temperature1 C37_Temperature2: library part Cap, "Cap, 0.01 µF, 16 V, X7R", LatestRevisionDate=17-Jul-2002, LatestRevisionNote="Re-released for DXP Platform.", PackageDescription="Radial Cap, Thru-Hole; 2 Leads; 0.3 in Pin Spacing", PackageReference=RAD-0.3, Published=8-Jun-2000, Publisher="Altium Limited"
C3 C6: library part GRM32ER71HxxxKdddd, "-55-125C, 1005, 50V, X7R, ±10%", =DNP
C4 C5 C8 C10 C15: library part GRM31CR71HxxxKdddd, "-55-125C, 3216, 50V, X7R, ±10%", =DNP
C13 C19 C20 C22: library part "Cap Semi", "Capacitor (Semiconductor SIM Model)", LatestRevisionDate=29-May-2009, LatestRevisionNote="IPC-7351 Footprint Added.", PackageDescription="Chip Capacitor", PackageReference=C1206, Published=8-Jun-2000, Publisher="Altium Limited"
C21 C25 C29 C31: library part GRM188R71AxxxKdddd, "-55-125C, 1608, 10V, X7R, ±10%", =DNP
C35: library part GRM022R71AxxxKdddd, "-55-125C, 1005, 10V, X7R, ±10%", =DNP
IND1: "LED", Color=Green
IND2: "LED", Color=Yellow
J1: library part CMP-2000-05246-1, "Micro-USB B Receptacle with Flange, -30 to 85 degC, 5-Pin SMD, RoHS, Tape and Reel", Color=Black, Manufacturer=Molex, Maximum Current Rating=1.8/ContactA, Maximum Voltage Rating=30VAC, Operating Temperature=-30to85C, Body Orientation=RightAngle, Contact Material=CopperAlloy, Contact Plating=GoldOverPalladiumNickelOverNickel, Datasheet URL=https://datasheet.ciiva.com/30075/304740473460001-io-nectors-30075527.pdf, Datasheet Version=Dec-13, Dimension=7.8x5.43x2.94mm, Gender=RCP, Housing Material=LiquidCrystalPolymer, Manufacturer URL=http://www.molex.com/, Mounting=SurfaceMount, Number of Contacts=5, Number of Ports=1, Number of Terminals=5, Packaging=EmbossedTapeandReel, Part No=47346-0001, Pitch=0.65mm, RoHS=Yes, Termination Method=Solder, Type=MicroUSBTypeB
J2: "JST Battery Connector"
J4: "Header, 3-Pin", LatestRevisionDate=17-Jul-2002, LatestRevisionNote="Re-released for DXP Platform.", Publisher="Altium Limited"
J5 J6 J7 J8 J9 J10: "Header, 3-Pin, Dual row", LatestRevisionDate=17-Jul-2002, LatestRevisionNote="Re-released for DXP Platform.", Publisher="Altium Limited"
L1: library part Inductor, "EMI Filter Beads, Chips & Arrays 0603 330ohms 100MHz Rdc 0.08ohms 1.7A", Code_IEC=1005, Code_JEITA=0402, LatestRevisionDate=29-May-2009, LatestRevisionNote="IPC-7351 Footprint Added.", PackageDescription="Chip Inductor", PackageReference=0402-A, Published=8-Jun-2000, Publisher="Altium Limited"
Q1: "MOSFET P-CH 12V 4.3A SOT-23", ComponentLink1Description="Manufacturer Link", ComponentLink1URL=http://www.irf.com/, ComponentLink2Description=Datasheet, ComponentLink2URL=http://www.irf.com/product-info/datasheets/data/IRLML6401.pdf, DatasheetVersion=2-Jul-2001, PackageDescription="3-Pin SOT-23 Package 0.95 mm Pitch, 2.3 mm Lead Span", PackageReference=Micro3, PackageVersion=Jul-2001, Published=17-Sep-2003, Publisher="Altium Limited"
R1 R2 R3 R4 R5 R6 R7 R8 R9 R10 R11 R12 R13 R14 R15 R16 R17 R18 R19 R20 R21 R22 R23 R24 R25 R26 R27 R28 R29 R30 R31 R32 R33 R34_Temperature1 R34_Temperature2 R36_Temperature1 R36_Temperature2 R38 R39: library part CRCW0402xxxxFKED, "0.125W, -55-155C, 1005, 50V, ±1%", =DNP
RESET1 SW1 WAKE: library part CMP-2000-06516-1, "Switch Tactile, SPST, 50 mA, 32 V, -40 to 85 degC, 4-Pin SMD, RoHS, Tape and Reel", Actuator Color=N/A, Contact Rating @ Voltage=1A, Dielectric Strength=>=250Vrms, Manufacturer="C&K Components", Maximum DC Voltage Rating=32V, Minimum Insulation Resistance=>=1000MOhm, Operating Force=3N, Operating Temperature=-40to85C, Package Description="4-Pin Surface Mount Device, Body 4.6 x 2.8 mm", Actuator Length=0.5mm, Actuator Style=Button, Base Material=N/A, Body Orientation=Straight, Contact Material=Silver, Contact Plating=Silver, Datasheet URL=http://www.ck-components.com/media/1479/kmr2.pdf, Datasheet Version=06/2016, Dimension=2.8x4.6x1.9mm, ECCN=EAR99, Electrical Life=N/A, Family=KMR2, Ground Terminal=Yes, Housing Material=N/A, HTS=8536501199, Illumination Type=N/R, Manufacturer URL=http://www.ckswitches.com/, Maximum AC Voltage Rating=N/A, Mechanical Life=150000Cycles, Mounting=SurfaceMount,GullWing, Mounting Technology=SurfaceMount, Package Reference=KMR231GLFS, Packaging=TapeandReel, Part No=KMR231GLFS, Pole Throw Configuration=SPST, Product Weight=N/A, RoHS=Yes, Seal Description=N/A, Seal Location=N/A, Supplier=C&KComponents, Switch Configuration=N.O., Type=Micro-Miniature
RS1 RS2: library part "Res Semi", "Current Sense Resistors - SMD 1/4watt .1ohms 1%", LatestRevisionDate=17-Jul-2002, LatestRevisionNote="Re-released for DXP Platform.", PackageDescription="Axial Device, Thru-Hole; 2 Leads; 0.5 in Pin Spacing", PackageReference=AXIAL-0.5, Published=8-Jun-2000, Publisher="Altium Limited"
SD1: library part CMP-2000-05030-1, "Card Connector Micro-SD, 500 VAC, 100 mOhm Min, 0.5 A, RoHS, Tape and Reel", Manufacturer=3M, Package Description="8-Pin Surface Mount Device, Body 15.2 x 14 mm, Pitch 1.1 mm", Standard Package=1, Card Type=SecureDigital-microSD™, Catalog Drawings=2908-05WB-MG, Category=Connectors,Interconnects, Connector Type=ConnectorandEjector, Contact Finish=Gold, Contact Finish Thickness=15µin(0.38µm), Datasheet URL=http://datasheet.octopart.com/2908-05WB-MG-3M-datasheet-6398107.pdf, Datasheet Version=Oct-06, Ejector Side=-, Family=MemoryConnectors-PCCardSockets, Featured Product=3MCardConnectormicroSD, Features=Switch, Insertion, Removal Method=PushIn,PushOut, Manufacturer URL=http://www.3m.com/, Mounting Feature=Normal,Standard-Top, Mounting Type=SurfaceMount,RightAngle, Number of Positions=10(8+2), Online Catalog=2900Series, Other Names=3M5607CT, Other Related Documents=SDCardDateCodeDecipher, Package Reference=2908-05WB-MG, Packaging=CutTape(CT), PCN Obsolescence/ EOL=2908Series30/Jun/2010, Series=2900
U1: library part CMP-0476-00225-1, "1.1 A, Low Noise, Low Dropout Linear Regulator, 1.8 to 20 V Vin, 3.3 V Vout, 8-pin SON (DD-8), -40 to 125 degC, Pb-Free, Tape and Reel", Dropout Voltage(V)=0.31, Manufacturer="Linear Technology", Output Voltage="3.3 V", Shutdown Current(uA)=1, Code_JEDEC=MO-229, ComponentLink1Description="Manufacturer URL", ComponentLink1URL=http://www.linear.com/, ComponentLink2Description=Datasheet, ComponentLink2URL=http://cds.linear.com/docs/en/datasheet/1965fa.pdf, ComponentLink3Description="Package Specification", ComponentLink3URL=http://cds.linear.com/docs/en/packaging/DFN_8_05-08-1698.pdf, DatasheetVersion="Rev. A", Discrete Pass Element=no, Iout(mA)=1100, Isupply(mA)=0.5, Mounting Technology="Surface Mount", Noise(uV)=40, Number of Outputs=1, PackageDescription="8-Pin Plastic DFN, Body 3 x 3 mm, Pitch 0.5 mm", PackageReference=DD-8, PackageVersion=Jun-10, Packing="Tape and Reel", PartNumber=LT1965EDD-3.3#TRPBF, PSRR(dB)=75, RoHS=TRUE, Vin Max(V)=20, Vin Min(V)=1.8
U2: "USB Power Manager, 4.35 to 5.5 V Vin, 6-pin SOT23 (S6-6), -40 to 85 degC, Pb-Free", Manufacturer="Linear Technology", Supplier Part Number 1=78T3424, Code_JEDEC=MO-193, ComponentLink1Description="Manufacturer URL", ComponentLink1URL=http://www.linear.com/, ComponentLink2Description=Datasheet, ComponentLink2URL=http://cds.linear.com/docs/en/datasheet/4410fs.pdf, ComponentLink3Description="Package Specification", ComponentLink3URL=http://cds.linear.com/docs/en/packaging/SOT_6_05-08-1636.pdf, Ideal Diode="Single, External, P-Channel", Mounting Technology="Surface Mount", PackageDescription="6-Pin Plastic TSOT-23, Body 2.9 x 1.63 mm, Pitch 0.95 mm", PackageReference=S6-6, PackageVersion=Jun-10, PartNumber=LTC4410ES6#PBF, RoHS=TRUE, Supplier 1=Newark
U3: "USB Compatible Lithium-Ion Battery Charger with Thermal Regulation, 4.25 to 6.5 V Vin, 10-pin SOP (MSE-10-EDP), -40 to 85 degC, Pb-Free", Float Voltage="4.2 V", Manufacturer="Linear Technology", Max Charge Current(A)=1.25, Supplier Part Number 1=LTC4053EMSE-4.2#PBF-ND, Battery Chemistry="Li-Ion, Li-Polymer", Charge Termination="On-board timer", ComponentLink1Description="Manufacturer URL", ComponentLink1URL=http://www.linear.com/, ComponentLink2Description=Datasheet, ComponentLink2URL=http://cds.linear.com/docs/en/datasheet/4053-4.2fs.pdf, ComponentLink3Description="Package Specification", ComponentLink3URL=http://cds.linear.com/docs/en/datasheet/3481fc.pdf, DatasheetVersion="Rev. A", Mounting Technology="Surface Mount", Number of Cells=1, PackageDescription="10-Pin Plastic MSOP, Exposed Die Pad, Body 3 x 3 mm, Pitch 0.5 mm", PackageReference=MSE-10, PackageVersion="Rev. C, 08/2009", PartNumber=LTC4053EMSE-4.2#PBF, RoHS=TRUE, Supplier 1=Digi-Key, Supplier 2=Farnell, Supplier 3=Newark, Supplier Part Number 2=1663727, Supplier Part Number 3=58M0850, Type of Charger=Linear, Vin Max(V)=6.5, Vin Min(V)=4.25
U4: library part CMP-2000-05129-1, "6-Axis Xtrinsic Sensor with Integrated Linear Accelerometer and Magnetometer, 1.95 to 3.6 V, -40 to 85 degC, 16-Pin QFN, RoHS, Tape and Reel", Manufacturer=Freescale, Maximum Operating Temperature=+85C, Minimum Operating Temperature=-40C, Operating Supply Voltage=1.95Vto3.6V, Package / Case=QFN-16, Package Description="16-Pin Quad Flat No-lead Package, Body 3 x 3 mm, Pitch 0.5 mm", Supply Voltage - Max=3.6V, Supply Voltage - Min=1.95V, Brand=FreescaleSemiconductor, Datasheet URL=https://datasheet.ciiva.com/12175/fxos8700cq-60595-12175213.pdf, Datasheet Version="Rev. 1, 06/2012", Factory Pack Quantity=1000, Manufacturer URL=http://www.nxp.com/, Mounting Style=SMD/SMT, Output Type=Digital, Package Reference=QFN-16, Packaging=Reel, Product Category=BoardMountAccelerationSensors, RoHS=Details, Sensing Axis=X,Y,Z, Tradename=Xtrinsic, Type=6AxisSensor, Unit Weight=0.000808oz
U5: "3-Axis Digital Angular Rate  Gyroscope"
U6: "Tiva TM4C123GH6PM Microcontroller"
U7: library part CMP-2000-07060-1, "I2C Humidity and Temperature Sensor, 1.9 to 3.6 V, -40 to 125 degC, 6-Pin DFN, RoHS, Tube", Manufacturer="Silicon Labs", Maximum Operating Supply Voltage=3.6V, Maximum Operating Temperature=+125°C, Minimum Operating Supply Voltage=1.9V, Minimum Operating Temperature=-40°C, Package Description="6-Pin Small Outline No-Lead Package, Body 3 x 3 mm, Pitch 1 mm", Package Reference=DFN-6, Package Type=DFN, Accuracy=±1°C,±5%RH, Datasheet URL=https://www.silabs.com/Support%20Documents%2FTechnicalDocs%2FSi7006-A20.pdf, Datasheet Version="Rev. 1.1, 06/2015", Dimensions=3x3x0.75mm, Height=0.75mm, Interface Type=I2C, Length=3mm, Manufacturer URL=http://www.silabs.com/, Mounting Technology=SurfaceMount, Mounting Type=SurfaceMount, Output Type=Digital, Pin Count=6, Resolution=12(Humidity)bit,14(Temperature)bit, Sensor Function=Temperature&Humidity, Width=3mm
U9_Temperature1 U9_Temperature2: library part CMP-1685-00013-1, "Low Power Digital Temperature Sensor with SMBus and Two-Wire Serial Interface, 1.4 to 3.6 V, -40 to 125 degC, 6-Pin SOT (DRL), Green (RoHS & no Sb/Br), Tape and Reel", ComponentLink1Description="Manufacturer URL", ComponentLink1URL=http://www.ti.com/, ComponentLink2Description=Datasheet, ComponentLink2URL=http://www.ti.com/lit/ds/symlink/tmp102.pdf, ComponentLink3Description="Package Specification", ComponentLink3URL=http://www.ti.com/lit/ml/mpds159c/mpds159c.pdf, DatasheetVersion="SBOS397F, 12/2015", PackageDescription="6-Pin Plastic Small Outline, Body 1.6 x 1.2 mm, Pitch 0.5 mm", PackageReference=DRL0006A, PackageVersion="4205622-3/D, 08/2207"
Y1: "Crystal, 16.000MHz, 20pF, 100ppm, -55 to 125 C, 60 O"
Y2: library part CC7V-T1A, "Crystals 32.768 kHz 12.5 pF +/-20 PPM -55/+125C"

## Via types
v1: diameter 19.68, hole 7.87, Top Layer to Bottom Layer, 191 vias

## Nets (pads, with @x,y where several pads share a name; then routed paths per layer and width w, separated by ;. In a path a pad name is that pad's centre, name@x,y a point inside that pad or via, vN(x,y) a via of type N, cw(c..) or ccw(c..) an arc to the next point about the centre after c; other vN are vias at no path point)
A0/sIO_UARTRX: J4.2 U6.17 | length 439.9
  Top Layer w8: J4.2@1212.5,3400 1190,3377.5 1190,3355 1300,3245 v1(1300,3125) 1347.95,3077.05 U6.17@1390.12,3077.05
A1/sIO_UARTTX: J4.3 U6.18 | length 542.6
  Top Layer w8: J4.3@1112.5,3397.5 1090,3375 1100,3375 1153.13,3321.88 1215,3260 1250,3260 1275,3235 v1(1275,3100) 1317.64,3057.36 U6.18@1390.12,3057.36
A2/SPI0_SCK: SD1.5 U6.19 | length 2602.9
  Top Layer w8: v1(1210,1160) 1210,1234.8 SD1.5@1213.15,1237.95 ; v1(1250,3075) 1287.32,3037.68 U6.19@1390.12,3037.68
  Bottom Layer w8: v1(1210,1160) 1150,1160 1070,1240 1070,1311.1 1278.16,1519.26 1278.16,1974.44 1298.84,1995.12 1298.84,2035.44 1308.84,2045.44 1308.84,2378.36 1285.34,2401.86 1285.34,2466.37 1042.16,2709.55 1042.16,2977.24 1139.91,3075 v1(1250,3075)
A3/sSD_CS: SD1.2 U6.20 | length 2826.2
  Top Layer w8: v1(1225,3050) 1257.01,3017.99 U6.20@1390.12,3017.99 ; SD1.2@1343.07,1253.7 1343.07,1323.07 1350,1316.14 v1(1350,1165)
  Bottom Layer w8: v1(1225,3050) 1223.84,3048.84 1139.21,3048.84 1065.16,2974.79 1065.16,2854.79 1060.16,2849.79 1060.16,2717.01 1303.34,2473.83 1303.34,2409.32 1326.84,2385.81 1326.84,2037.98 1316.84,2027.98 1316.84,1987.67 1296.16,1966.98 1296.16,1511.81 1095,1310.65 1095,1245 1150,1190 1245,1190 1270,1165 v1(1350,1165)
A4/sSPI0_MISO: SD1.7 U6.21 | length 2274.2
  Top Layer w8: SD1.7@1126.53,1237.95 v1(1126.53,1308.46) ; v1(1200,3025) 1226.69,2998.31 U6.21@1390.12,2998.31
  Bottom Layer w8: v1(1126.53,1308.46) 1314.16,1496.09 1314.16,1959.53 1334.84,1980.21 1334.84,2020.53 1344.84,2030.53 1344.84,2393.27 1321.34,2416.77 1321.34,2481.28 1078.16,2724.46 1078.16,2842.33 1083.16,2847.33 1083.16,2967.33 1140.83,3025 v1(1200,3025)
A5/sSPI0_MOSI: SD1.3 U6.22 | length 2175
  Top Layer w8: v1(1175,3000) 1196.38,2978.62 U6.22@1390.12,2978.62 ; SD1.3@1299.76,1237.95 1299.76,1309.76 v1(1300,1310)
  Bottom Layer w8: v1(1175,3000) 1173.84,2998.84 1140.12,2998.84 1101.16,2959.88 1101.16,2839.88 1096.16,2834.88 1096.16,2731.92 1339.34,2488.74 1339.34,2424.23 1362.84,2400.72 1362.84,2023.07 1353.16,2013.39 1353.16,1968.16 1335,1950 1335,1480 1300,1445 v1(1300,1310)
A6/sI2C1_SCL: J5.2 J6.2 J7.2 R27.1 U6.23 | length 1379.4
  Top Layer w8: R27.1@1050,2949.68 1050,2975 1065,2990 1135,2990 v1(1150,2975) 1166.06,2958.94 U6.23@1390.12,2958.94
  Bottom Layer w8: v1(1150,2975) 1285,2975 1340,3030 1340,3335.32 1459.84,3455.16 1759.84,3455.16 J5.2@1765,3450
A7/sI2C1_SDA: J5.4 J6.4 J7.4 R28.1 U6.24 | length 2045.6
  Top Layer w8: R28.1@1090,2949.68 1090.31,2950 v1(1125,2950) 1135.75,2939.25 U6.24@1390.12,2939.25 ; v1(1651.91,3425) 1710.6,3483.69 1815,3483.69 ; J5.4@1815,3450 1815,3483.69 ; J7.4@2345,3450 2345,3465 2326.31,3483.69 2080,3483.69 ; 1815,3483.69 1996.32,3483.69 2080,3483.69 ; 2080,3483.69 J6.4@2080,3450 2080,3483.69
  Bottom Layer w8: v1(1125,2950) 1300,2950 1365,3015 1365,3308.09 1483.46,3426.54 1653.46,3426.54 v1(1651.91,3425)
B2/sI2C0_SCL: R21.1 U4.4 U5.11 U6.47 | length 2549.4
  Top Layer w8: v1(1045,2035) 1065,2035 1095.63,2065.63 U4.4@1120,2065.63 ; U6.47@1742.48,2705 1742.48,2662.52 1755,2650 1755,2570 1785.31,2539.68 R21.1@1845,2539.68 1999.68,2539.68 1989.37,2550 v1(1980,2550) ; U5.11@2265,2422.09 2265,2455 2295,2485 v1(2310,2485)
  NS w8: v1(1980,2550) 1985,2545 v1(1985,1960)
  EW w8: v1(1045,2035) 1066.16,2013.84 1074.88,2013.84 1088.84,1999.88 1088.84,1982.44 1111.28,1960 1431.28,1960 1455.12,1936.16 1474.88,1936.16 1498.72,1960 v1(1985,1960) ; v1(1980,2550) 1990,2550 2035.84,2504.16 2204.56,2504.16 2223.72,2485 v1(2310,2485)
B3/sI2C0_SDA: R23.1 U4.6 U5.12 U6.48 | length 2453.4
  Top Layer w8: v1(1130,1935) 1130,1940 1149.53,1959.53 U4.6@1149.53,2036.1 ; U6.48@1762.16,2705 1762.16,2668.29 1779,2651.46 1779,2601 1790,2590 R23.1@1845,2590 v1(1925,2590) ; v1(2200,2475) 2225,2475 2245.31,2454.68 U5.12@2245.31,2422.09
  NS w8: v1(1925,2590) 1925,2468.29 1915.37,2458.66 1915.37,1944.63 v1(1985,1875)
  EW w8: v1(1130,1935) 1141.16,1923.84 1194.88,1923.84 1243.72,1875 1666.28,1875 1690.12,1851.16 1709.88,1851.16 1733.72,1875 v1(1985,1875) ; v1(1925,2590) 1925,2571.28 2039.81,2456.47 2114.56,2456.47 2133.09,2475 v1(2200,2475)